# Altium PCB HolderDog.PcbDoc
Units mm, origin at the board's own origin, x right, y up, seen from the top; angles counter-clockwise.
Board outline 356.65 x 138 mm, 2 copper layers (Top Layer, Bottom Layer); 20 components, 15 nets, 104 pads, 35 vias.
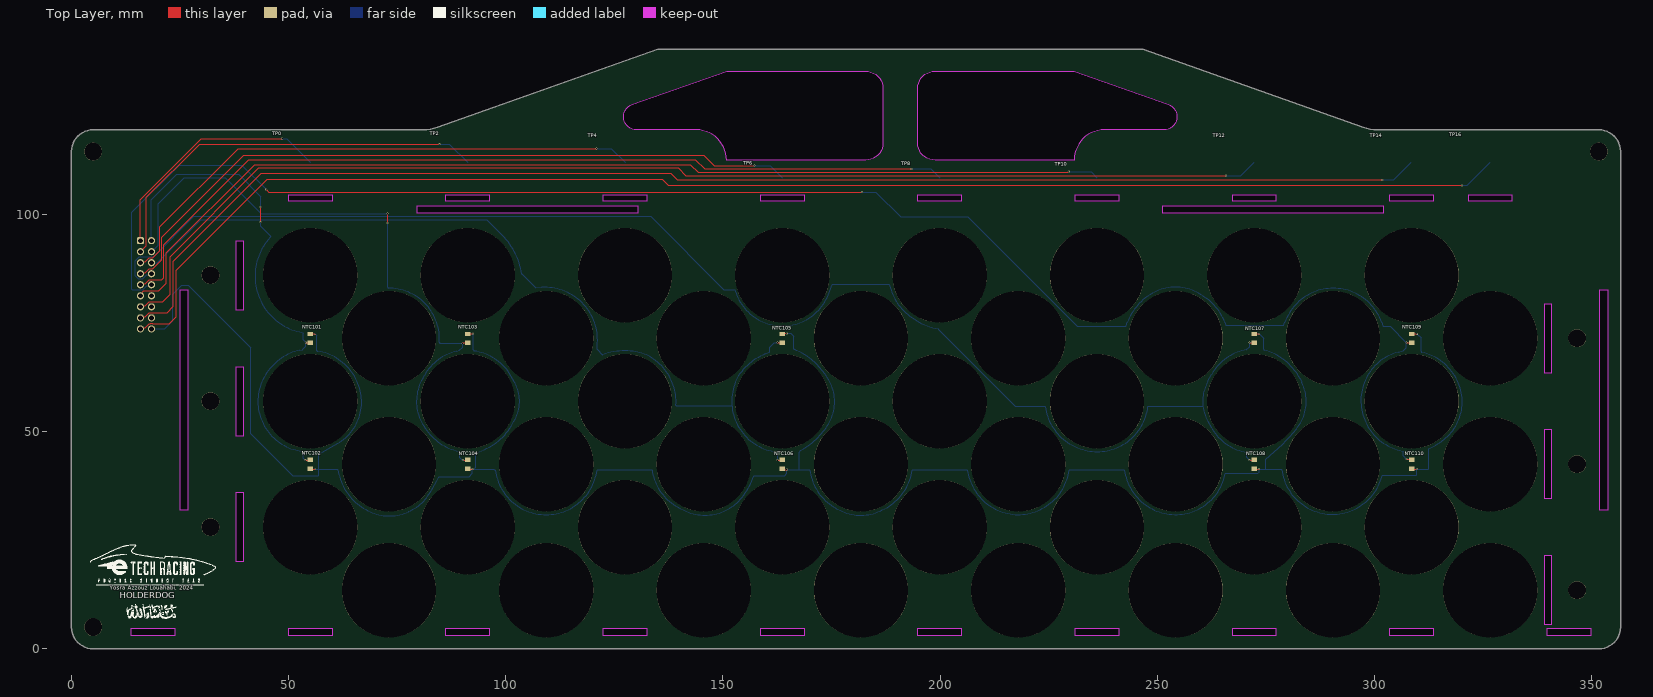
[diagram p0: Top Layer view]
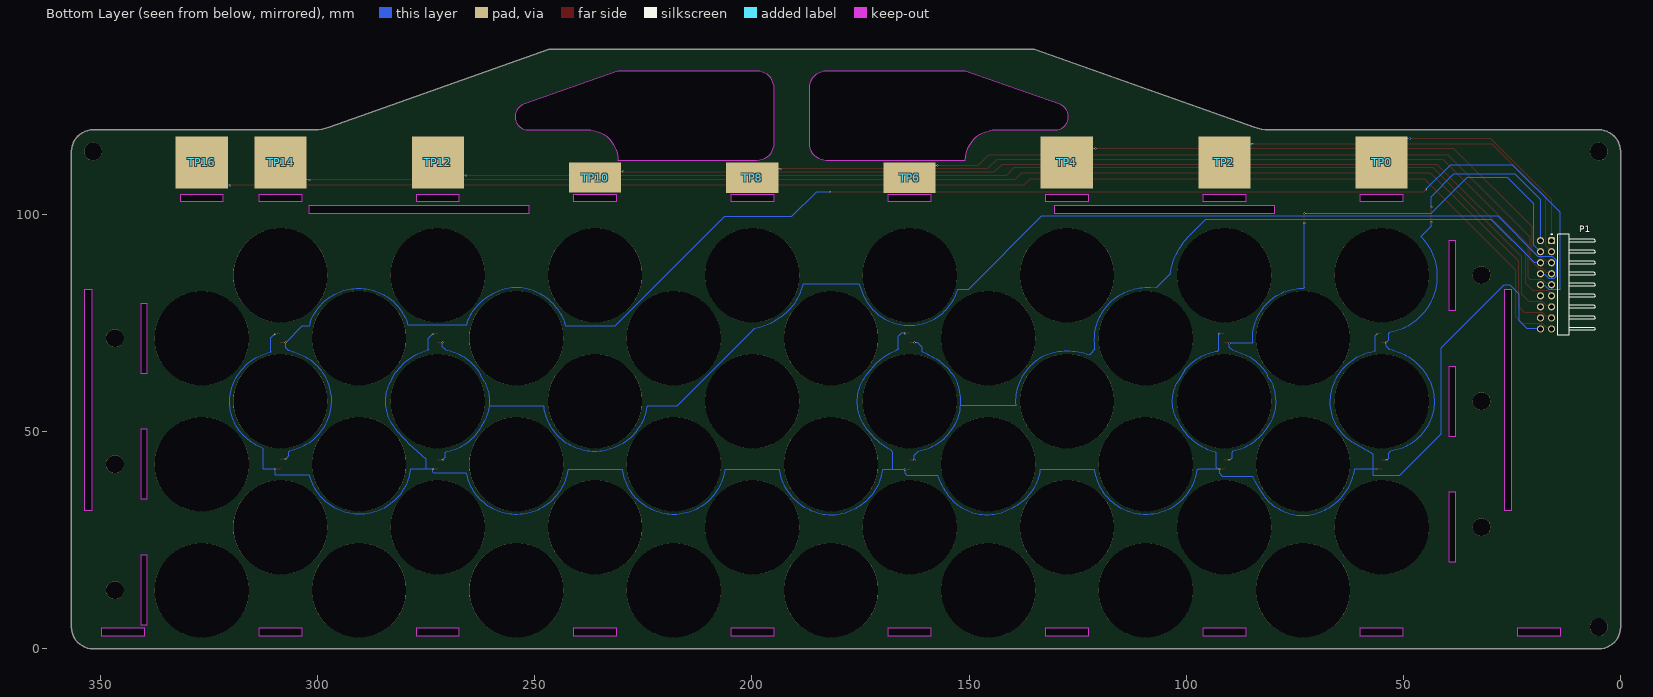
[diagram p1: Bottom Layer view, seen from below]
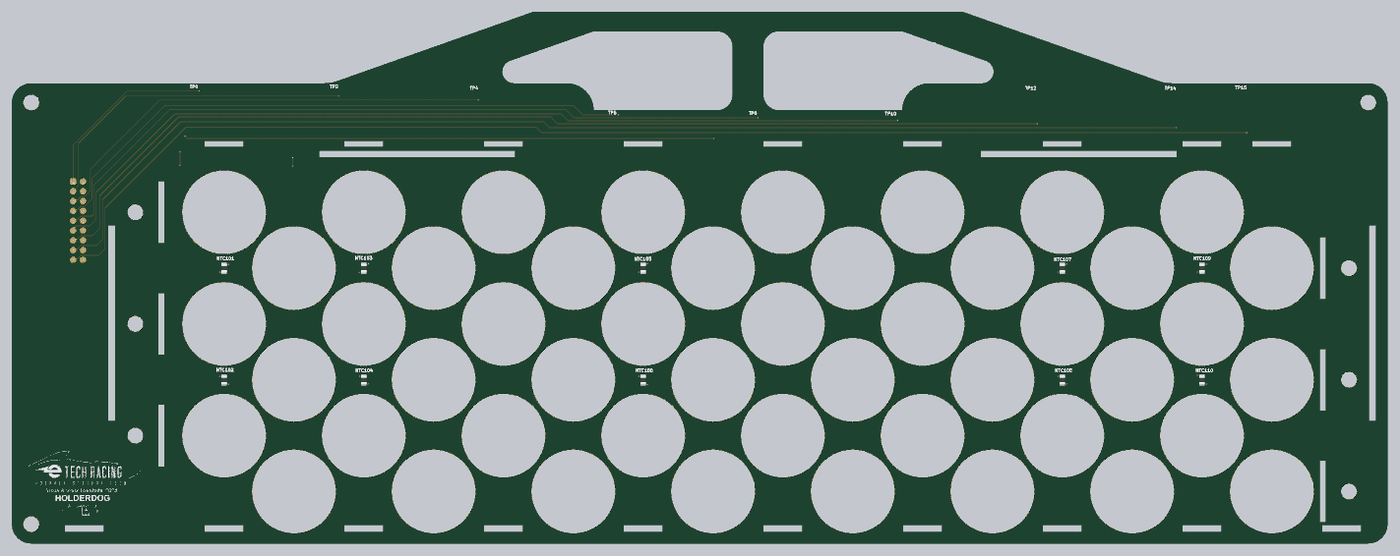
[diagram p2: 3D render of the assembled board from above, using the file's embedded part models]

## Layer stack, top to bottom
Top Solder: solder mask 0.0102, Solder Resist, Dk 3.5
Top Layer: signal copper 0.0356
Dielectric 1: dielectric 0.32, FR-4, Dk 4.8
Bottom Layer: signal copper 0.0356
Bottom Solder: solder mask 0.0102, Solder Resist, Dk 3.5

## Board outline
134.977,138 84.31,120.073 83.497,119.824 82.666,119.644 81.823,119.536 80.974,119.5 5,119.5 4.347,119.457 3.706,119.33 3.087,119.119 2.5,118.83 1.956,118.467 1.464,118.036 1.033,117.544 0.67,117 0.381,116.413 0.17,115.794 0.043,115.153 0,114.5 0,5 0.043,4.347 0.17,3.706 0.381,3.087 0.67,2.5 1.033,1.956 1.464,1.464 1.956,1.033 2.5,0.67 3.087,0.381 3.706,0.17 4.347,0.043 5,0 351.65,0 352.303,0.043 352.945,0.17 353.564,0.381 354.15,0.67 354.694,1.033 355.186,1.464 355.617,1.956 355.981,2.5 356.27,3.087 356.48,3.706 356.608,4.347 356.65,5 356.65,114.5 356.608,115.153 356.48,115.794 356.27,116.413 355.981,117 355.617,117.544 355.186,118.036 354.694,118.467 354.15,118.83 353.564,119.119 352.945,119.33 352.303,119.457 351.65,119.5 300.676,119.5 299.827,119.536 298.984,119.644 298.153,119.824 297.341,120.073 246.673,138
cut-out: 50,4.75 60,4.75 60,3 50,3
cut-out: 303.54,3 303.54,4.75 313.54,4.75 313.54,3
cut-out: 340.65,5.5 339.15,5.5 339.15,21.5 340.65,21.5
cut-out: 39.5,20 38,20 38,36 39.5,36
cut-out: 340.65,34.5 339.15,34.5 339.15,50.5 340.65,50.5
cut-out: 39.5,49 38,49 38,65 39.5,65
cut-out: 339.76,4.75 349.76,4.75 349.76,3 339.76,3
cut-out: 267.32,4.75 277.32,4.75 277.32,3 267.32,3
cut-out: 194.88,4.75 204.88,4.75 204.88,3 194.88,3
cut-out: 122.44,4.75 132.44,4.75 132.44,3 122.44,3
cut-out: 25,31.875 25,82.625 26.75,82.625 26.75,31.875
cut-out: 302.025,102 302.025,100.25 251.275,100.25 251.275,102
cut-out: 79.625,102 130.375,102 130.375,100.25 79.625,100.25
cut-out: 351.9,82.625 353.65,82.625 353.65,31.875 351.9,31.875
cut-out: 50,104.5 60,104.5 60,103 50,103
cut-out: 86.22,104.5 96.22,104.5 96.22,103 86.22,103
cut-out: 122.44,104.5 132.44,104.5 132.44,103 122.44,103
cut-out: 158.66,104.5 168.66,104.5 168.66,103 158.66,103
cut-out: 231.1,104.5 241.1,104.5 241.1,103 231.1,103
cut-out: 267.32,104.5 277.32,104.5 277.32,103 267.32,103
cut-out: 303.54,104.5 313.54,104.5 313.54,103 303.54,103
cut-out: 339.15,79.5 340.65,79.5 340.65,63.5 339.15,63.5
cut-out: 38,94 39.5,94 39.5,78 38,78
cut-out: 241.1,4.75 241.1,3 231.1,3 231.1,4.75
cut-out: 168.66,4.75 168.66,3 158.66,3 158.66,4.75
cut-out: 96.22,4.75 96.22,3 86.22,3 86.22,4.75
cut-out: 23.78,4.75 23.78,3 13.78,3 13.78,4.75
cut-out: 321.65,104.5 331.65,104.5 331.65,103 321.65,103
cut-out: 194.88,104.5 204.88,104.5 204.88,103 194.88,103
cut-out: 186.825,129 186.825,116.5 186.776,115.874 186.629,115.264 186.389,114.684 186.061,114.149 185.654,113.672 185.176,113.264 184.641,112.936 184.061,112.696 183.451,112.549 182.825,112.5 150.825,112.5 150.781,113.284 150.65,114.058 150.432,114.812 150.132,115.537 149.752,116.224 149.298,116.864 148.775,117.45 148.19,117.973 147.549,118.427 146.862,118.807 146.137,119.107 145.383,119.324 144.609,119.456 143.825,119.5 130.143,119.5 129.622,119.546 129.117,119.681 128.643,119.902 128.215,120.202 127.845,120.572 127.545,121 127.324,121.474 127.189,121.979 127.143,122.5 127.19,123.025 127.327,123.533 127.551,124.01 127.855,124.44 128.23,124.81 128.663,125.11 129.143,125.328 150.825,133 182.825,133 183.451,132.951 184.061,132.804 184.641,132.564 185.176,132.236 185.654,131.828 186.061,131.351 186.389,130.816 186.629,130.236 186.776,129.626
cut-out: 230.825,112.5 198.825,112.5 198.199,112.549 197.589,112.696 197.009,112.936 196.474,113.264 195.997,113.672 195.589,114.149 195.261,114.684 195.021,115.264 194.874,115.874 194.825,116.5 194.825,129 194.874,129.626 195.021,130.236 195.261,130.816 195.589,131.351 195.997,131.828 196.474,132.236 197.009,132.564 197.589,132.804 198.199,132.951 198.825,133 230.825,133 252.508,125.328 252.985,125.111 253.417,124.813 253.791,124.445 254.095,124.017 254.32,123.543 254.459,123.038 254.507,122.515 254.464,121.992 254.33,121.485 254.11,121.009 253.811,120.578 253.441,120.206 253.011,119.904 252.536,119.682 252.03,119.546 251.507,119.5 237.825,119.5 237.041,119.456 236.268,119.324 235.513,119.107 234.788,118.807 234.101,118.427 233.461,117.973 232.875,117.45 232.352,116.864 231.898,116.224 231.518,115.537 231.218,114.812 231.001,114.058 230.869,113.284

## Design rules (kind name [scope] priority, off if disabled: settings)
Clearance [All] p1: gap=0.254 ignorepadtopadclearanceinfootprint=FALSE
DiffPairsRouting [All] p1: maxlimit=0.2 minlimit=0.2 mostfreqgap=0.2 toplayer_minwidth=0.2 toplayer_maxwidth=0.2 toplayer_prefwidth=0.2 bottomlayer_minwidth=0.2 bottomlayer_maxwidth=0.2 bottomlayer_prefwidth=0.2 maxuncoupledlength=12.7
PolygonConnect [All] p1: connectstyle=Relief reliefconductorwidth=0.254 reliefentries=4 polygonreliefangle="90 Angle" airgapwidth=0.254
RoutingVias [All] p1: holewidth=0.3 width=0.45 viastyle="Through Hole" minholewidth=0.3 minwidth=0.45 maxholewidth=0.3 maxwidth=0.45
SolderMaskExpansion [All] p1: expansion=0.102 istentingtop=FALSE
SupplyNets "Schematic Supply Nets" [InNet('GND')] p1: voltage=0.000
UnRoutedNet [All] p1: checkbadconnections=TRUE
Width [All] p1: maxlimit=0.2 minlimit=0.2 preferedwidth=0.2 minimp=50.000000 maximp=50.000000 favimp=50.000000
28 further rules are at their usual default settings.

## Components (designator, comment, footprint, x,y, rotation, side; value= is the part's Value field where it differs from the comment)
NTC101 "NTC SMD 0805" RESC2012X10N 55,71.501 r90 top
NTC102 "NTC SMD 0805" RESC2012X10N 55,42.5 r270 top
NTC103 "NTC SMD 0805" RESC2012X10N 91.22,71.5 r90 top
NTC104 "NTC SMD 0805" RESC2012X10N 91.22,42.5 r270 top
NTC105 "NTC SMD 0805" RESC2012X10N 163.66,71.501 r90 top
NTC106 "NTC SMD 0805" RESC2012X10N 163.66,42.5 r270 top
NTC107 "NTC SMD 0805" RESC2012X10N 272.32,71.501 r90 top
NTC108 "NTC SMD 0805" RESC2012X10N 272.32,42.5 r270 top
NTC109 "NTC SMD 0805" RESC2012X10N 308.54,71.501 r90 top
NTC110 "NTC SMD 0805" RESC2012X10N 308.54,42.5 r270 top
P1 "61301821021" 61301821021 13.145,83.82 r90 bottom
TP0 "Test Point" TESTPOINT_WIDE#1 55,111.999 r0 top
TP2 "Test Point" TESTPOINT_WIDE#1 91.22,111.987 r0 top
TP4 "Test Point" TESTPOINT_WIDE#1 127.508,112.014 r0 top
TP6 "Test Point" TESTPOINT_WIDE#2 163.703,108.458 r0 top
TP8 "Test Point" TESTPOINT_WIDE#2 199.898,108.458 r0 top
TP10 "Test Point" TESTPOINT_WIDE#2 236.1,108.508 r0 top
TP12 "Test Point" TESTPOINT_WIDE#1 272.288,112.014 r0 top
TP14 "Test Point" TESTPOINT_WIDE#1 308.483,112.014 r0 top
TP16 "Test Point" TESTPOINT_WIDE#1 326.65,112 r0 top

## Footprints (in the part's own frame and the unit in brackets; to place one, negate y for a bottom-side part, rotate by r counter-clockwise, add the part's x,y. Pads: shape width x height; smd on the part's side, far side on the other; paste and mask are expansions set on the pad)
61301821021 [mm] "Pin Header, pitch 2.54 mm, THT, Angled, dual row, 18p"
  rrect50% 1.65x1.65 hole 1.1: 1(10.16,2.73)
  round 1.65 hole 1.1: 2(10.16,5.27) 3(7.62,2.73) 4(7.62,5.27) 5(5.08,2.73) 6(5.08,5.27) 7(2.54,2.73) 8(2.54,5.27) 9(0,2.73) 10(0,5.27) 11(-2.54,2.73) 12(-2.54,5.27) 13(-5.08,2.73) 14(-5.08,5.27) 15(-7.62,2.73) 16(-7.62,5.27) 17(-10.16,2.73) 18(-10.16,5.27)
  silkscreen extent -11.58,-7.27 11.71,2.83, body extent -11.43,-7.27 11.43,5.63, height 5.12
RESC2012X10N [mm] "Chip Resistor, 2-Leads, Body 2,00x1,25mm, IPC Medium Density"
  rect 1x1.3 smd: 1(-1,0) 2(1,0)
  body extent -1.1,-0.7 1.1,0.7, height 0.95
TESTPOINT_WIDE#1 [mm]
  rect 12x12 smd far side paste-2539.97: 1(0,0)
TESTPOINT_WIDE#2 [mm]
  rect 12x7 smd far side paste-2539.97: 1(0,0)

## Part data
NTC101 NTC102 NTC103 NTC104 NTC105 NTC106 NTC107 NTC108 NTC109 NTC110: library part CMP-010-00001-1, "NTC 0805 package 10kR"
P1: library part CMP-002-00004-1, "Board Connector, 18 Contact(s), 2 Row(s), Male, Right Angle, 0.1 inch Pitch, Solder Terminal, Locking, Black Insulator, Plug", Max Operating Temperature=125°C, Min Operating Temperature=-40°C, Connector Type="BOARD CONNECTOR", Mounting Technology=Board, RoHS Compliant=Yes
TP0 TP2 TP4 TP6 TP8 TP10 TP12 TP14 TP16: library part TestPoint_Wide, "TestPoint 5x5mm"

## Free pads (board coordinates)
  round 4.1 hole 4.1: 1(5,5) 1(5,114.5) 1(32,28) 1(32,57) 1(32,86) 1(346.65,13.5) 1(346.65,42.5) 1(346.65,71.5) 1(351.65,114.5)
  round 21.7 hole 21.7: 1(55,28) 1(55,57) 1(55,86) 1(73.11,13.5) 1(73.11,42.5) 1(73.11,71.5) 1(91.22,28) 1(91.22,57) 1(91.22,86) 1(109.33,13.5) 1(109.33,42.5) 1(109.33,71.5) 1(127.44,28) 1(127.44,57) 1(127.44,86) 1(145.55,13.5) 1(145.55,42.5) 1(145.55,71.5) 1(163.66,28) 1(163.66,57) 1(163.66,86) 1(181.77,13.5) 1(181.77,42.5) 1(181.77,71.5) 1(199.88,28) 1(199.88,57) 1(199.88,86) 1(217.99,13.5) 1(217.99,42.5) 1(217.99,71.5) 1(236.1,28) 1(236.1,57) 1(236.1,86) 1(254.21,13.5) 1(254.21,42.5) 1(254.21,71.5) 1(272.32,28) 1(272.32,57) 1(272.32,86) 1(290.43,13.5) 1(290.43,42.5) 1(290.43,71.5) 1(308.54,28) 1(308.54,57) 1(308.54,86) 1(326.65,13.5) 1(326.65,42.5) 1(326.65,71.5)

## Via types
v1: diameter 0.45, hole 0.3, Top Layer to Bottom Layer, tented both sides, 35 vias

## Nets (pads, with @x,y where several pads share a name; then routed paths per layer and width w, separated by ;. In a path a pad name is that pad's centre, name@x,y a point inside that pad or via, vN(x,y) a via of type N, cw(c..) or ccw(c..) an arc to the next point about the centre after c; other vN are vias at no path point)
GND: NTC101.2 NTC102.2 NTC103.2 NTC104.2 NTC105.2 NTC106.2 NTC107.2 NTC108.2 NTC109.2 NTC110.2 P1.18 | length 622.3
  Top Layer w0.2: NTC102.2 55.098,41.402 v1(56.134,41.402) ; NTC101.2 55.016,72.517 v1(56.134,72.517) ; NTC104.2 91.318,41.402 v1(92.329,41.402) ; NTC103.2 91.237,72.517 92.261,72.517 92.388,72.644 v1(92.456,72.644) ; NTC106.2 163.885,41.275 v1(164.719,41.275) ; NTC105.2 163.803,72.644 v1(164.719,72.644) ; NTC108.2 272.418,41.402 v1(273.431,41.402) ; NTC107.2 272.336,72.517 v1(273.431,72.517) ; NTC110.2 308.638,41.402 v1(309.753,41.402) ; NTC109.2 308.556,72.517 v1(309.753,72.517)
  Bottom Layer w0.2: P1.18 21.463,73.66 23.368,75.565 23.368,81.661 25.4,83.693 26.924,83.693 41.275,69.342 41.275,49.53 50.959,39.846 56.779,39.846 56.896,39.963 56.896,41.402 ; v1(56.134,41.402) 56.896,41.402 ; v1(56.134,72.517) 56.515,72.136 56.515,68.671 56.543,68.624 ccw(c56.715,68.726) 56.682,68.529 cw(c54.77,56.612) 66.625,58.874 cw(c55.853,56.819) 61.325,47.315 56.896,44.766 56.896,41.402 ; v1(92.456,72.644) 92.456,68.89 92.583,68.763 92.583,68.707 92.612,68.66 ccw(c92.783,68.763) 92.751,68.565 cw(c90.897,56.649) 98.865,65.701 98.868,65.699 cw(c90.094,55.736) 99.812,64.781 cw(c91.25,56.809) 100.21,64.33 cw(c95.952,60.755) 100.382,64.116 cw(c100.222,63.995) 100.392,64.1 100.393,64.099 101.887,61.637 cw(c94.243,56.997) 101.888,52.358 101.237,51.285 cw(c89.643,58.321) 93.255,45.249 93.138,45.132 93.138,41.83 92.71,41.402 ; v1(164.719,72.644) 165.608,72.644 166.243,72.009 166.243,69.135 166.243,69.118 166.246,69.101 ccw(c166.443,69.135) 166.365,68.951 cw(c159.758,52.937) 169.939,66.953 cw(c162.545,56.773) 171.441,65.67 171.447,65.663 173.398,63.322 ; 173.398,63.321 cw(c165.699,56.908) 173.397,50.494 172.32,49.203 cw(c161.795,57.975) 168.565,46.063 167.884,45.676 167.513,45.305 167.513,41.275 ; v1(273.431,72.517) 274.447,71.501 274.447,68.982 274.447,68.946 274.46,68.911 ccw(c274.647,68.982) 274.593,68.79 cw(c271.101,55.914) 282.894,62.151 283.293,61.33 cw(c274.326,56.974) 282.054,50.676 cw(c230.125,92.991) 278.932,47.11 278.925,47.104 274.955,43.639 274.955,41.338 ; v1(309.753,72.517) 310.192,72.078 310.319,72.078 310.769,71.628 310.769,68.463 310.769,68.419 310.787,68.38 ccw(c310.969,68.463) 310.923,68.268 cw(c308.289,56.634) 319.983,58.989 cw(c309.245,56.827) 315.552,47.871 315.49,47.824 cw(c307.76,57.845) 313.609,46.622 312.664,46.129 312.547,46.012 312.547,45.996 312.547,41.519 312.43,41.402 v1(309.753,41.402) 309.753,40.122 309.636,40.005 301.901,40.005 301.783,39.888 301.534,39.114 cw(c290.352,42.71) 289.648,30.984 cw(c290.357,42.794) 278.725,40.636 278.616,41.221 278.499,41.338 278.441,41.338 274.955,41.338 ; 56.896,41.402 61.189,41.402 61.248,41.402 61.365,41.285 61.47,40.701 ccw(c73.435,42.844) 68.255,31.848 ccw(c73.189,41.046) 77.633,31.601 77.693,31.627 ccw(c73.849,40.738) 82.073,35.246 ccw(c46.074,59.283) 84.58,39.511 84.661,39.592 91.535,39.592 92.329,40.386 v1(92.329,41.402) 92.71,41.402 ; 92.71,41.402 97.268,41.402 97.395,41.275 97.454,41.275 97.571,41.158 ccw(c109.283,42.689) 109.283,30.877 ccw(c109.283,42.69) 120.907,40.58 121.012,41.158 121.129,41.275 133.511,41.275 133.57,41.275 133.687,41.158 ccw(c144.975,42.644) 139.997,32.405 141.08,31.878 ccw(c145.859,41.708) 150.653,31.885 150.669,31.893 ccw(c146.243,41.176) 153.984,34.405 153.989,34.411 ccw(c142.23,44.688) 157.057,39.786 157.15,39.878 164.211,39.878 164.719,40.386 v1(164.719,41.275) 167.513,41.275 ; 167.513,41.275 169.803,41.275 169.862,41.275 169.979,41.158 ccw(c181.676,42.698) 175.857,32.435 ccw(c180.825,41.195) 176.389,32.153 176.464,32.117 ccw(c181.716,41.575) 186.713,31.979 ccw(c181.787,42.822) 193.479,40.556 193.595,41.158 193.713,41.275 206.109,41.275 206.168,41.275 206.285,41.158 ccw(c217.86,42.675) 212.719,32.194 212.754,32.176 ccw(c217.999,42.283) 222.978,32.042 223.011,32.059 ccw(c218.13,42.676) 229.717,41.158 229.834,41.275 242.239,41.275 242.296,41.275 242.414,41.158 242.529,40.558 ccw(c254.219,42.81) 253.374,30.935 ccw(c254.203,42.586) 265.456,39.456 265.684,40.269 265.801,40.386 273.177,40.386 273.431,40.64 v1(273.431,41.402) 273.479,41.354 273.656,41.354 273.671,41.338 274.955,41.338
NTC1: NTC101.1 NTC102.1 P1.2 | length 120.6
  Top Layer w0.2: v1(43.561,98.227) v1(43.561,101.727) ; v1(53.848,43.434) 54.934,43.434 NTC102.1 ; v1(53.975,70.485) 54.984,70.485 NTC101.1
  Bottom Layer w0.2: P1.2 18.415,103.442 24.193,109.22 38.481,109.22 43.561,104.14 v1(43.561,101.727) ; v1(43.561,98.227) 43.561,97.282 45.854,94.989 45.854,94.823 45.669,94.619 ccw(c55.423,85.796) 52.532,72.966 53.223,72.81 53.34,72.693 53.34,72.64 53.34,71.12 v1(53.975,70.485) 53.975,69.668 53.264,68.957 53.223,68.916 53.167,68.903 52.555,68.764 ccw(c55.251,56.938) 46.982,65.812 ccw(c58.29,53.676) 45.667,64.437 ccw(c54.43,56.966) 51.667,45.787 52.934,45.473 52.988,45.46 53.394,45.054 53.394,43.888 v1(53.848,43.434)
NTC2: NTC103.1 NTC104.1 P1.4 | length 152
  Top Layer w0.2: v1(72.771,98.044) v1(72.771,100.203) ; v1(90.043,70.358) 90.111,70.358 90.253,70.5 NTC103.1 ; v1(90.17,43.434) 91.154,43.434 NTC104.1
  Bottom Layer w0.2: P1.4 19.939,92.964 19.939,102.426 25.971,108.458 35.433,108.458 43.688,100.203 v1(72.771,100.203) ; v1(72.771,98.044) 72.771,83.258 72.771,83.176 72.829,83.117 72.888,83.058 72.97,83.058 cw(c73.004,71.328) 84.709,70.57 ccw(c84.909,70.558) 84.802,70.389 84.851,70.358 84.909,70.358 v1(90.043,70.358) 90.043,69.467 89.33,68.754 89.291,68.714 89.237,68.701 88.651,68.554 ccw(c91.525,57.08) 81.295,63.018 ; 81.295,63.018 80.839,62.233 ccw(c89.875,56.989) 81.107,51.31 ccw(c91.569,57.381) 88.643,45.644 89.291,45.482 89.408,45.365 89.408,45.315 89.408,43.942 89.872,43.478 90.126,43.478 v1(90.17,43.434)
NTC3: NTC105.1 NTC106.1 P1.6 | length 203.2
  Top Layer w0.2: v1(162.56,43.434) 163.594,43.434 NTC106.1 ; v1(162.56,70.485) 163.644,70.485 NTC105.1
  Bottom Layer w0.2: P1.6 19.812,88.9 29.718,98.806 95.601,98.806 99.179,95.227 cw(c87.798,83.844) 103.704,86.314 103.709,86.283 103.755,86.237 106.867,83.125 108.297,83.207 cw(c108.991,71.097) 121.101,70.403 121.024,69.063 121.023,69.057 121.023,68.969 122.251,67.741 122.367,67.741 cw(c127.32,54.082) 129.337,68.47 129.367,68.467 cw(c128.116,58.133) 134.086,66.659 cw(c127.206,56.834) 139.18,56.124 139.297,56.007 139.365,56.007 152.019,56.007 ; v1(162.56,43.434) 162.56,44.572 161.798,45.334 161.739,45.393 161.7,45.433 cw(c163.77,57.013) 153.111,61.987 cw(c166.033,55.957) 153.532,62.818 cw(c164.629,55.527) 159.774,67.886 160.665,68.236 160.782,68.353 160.782,69.469 161.798,70.485 v1(162.56,70.485)
NTC4: NTC107.1 NTC108.1 P1.8 | length 336
  Top Layer w0.2: v1(271.272,43.434) 272.254,43.434 NTC108.1 ; v1(271.272,70.485) 272.304,70.485 NTC107.1
  Bottom Layer w0.2: P1.8 18.163,86.108 17.29,86.108 16.363,85.181 15.387,85.181 14.696,85.872 14.696,89.388 15.569,90.261 18.903,90.261 28.21,99.568 133.327,99.568 150.191,82.704 152.615,82.704 152.702,82.617 153.195,81.409 ccw(c163.7,85.694) 174.205,81.408 175.206,83.86 175.235,83.888 175.293,83.947 188.173,83.947 188.219,83.947 188.336,83.83 188.525,83.15 ccw(c200.058,86.351) 191.595,77.886 ccw(c202.479,88.772) 199.509,73.668 199.552,73.625 217.297,55.88 224.047,55.88 224.108,55.88 224.225,55.763 ccw(c235.67,57.16) 230.792,46.712 231.217,46.514 ccw(c236.171,57.124) 241.127,46.514 ccw(c236.142,57.188) 247.836,55.763 247.953,55.88 260.497,55.88 260.5,55.883 ; v1(271.272,43.434) 270.637,44.069 270.637,45.106 270.637,45.157 270.52,45.275 cw(c272.491,56.686) 262.393,51.019 261.649,52.344 cw(c269.926,56.987) 260.5,55.883 ; v1(271.272,70.485) 271.272,69.601 270.52,68.849 ccw(c272.46,57.63) 262.531,63.202 261.649,61.631 ccw(c269.926,56.987) 260.5,55.883
NTC5: NTC109.1 NTC110.1 P1.10 | length 393
  Top Layer w0.2: v1(44.831,105.791) 45.466,105.156 v1(181.991,105.156) ; v1(307.34,43.688) 308.352,43.688 NTC110.1 ; v1(307.34,70.485) 308.524,70.485 NTC109.1
  Bottom Layer w0.2: P1.10 18.163,83.568 17.29,83.568 16.363,82.641 13.96,82.641 13.843,82.758 13.843,100.467 13.96,100.584 13.97,100.584 24.765,111.379 39.243,111.379 v1(44.831,105.791) ; v1(181.991,105.156) 185.166,105.156 190.881,99.441 206.375,99.441 231.521,74.295 242.685,74.295 242.72,74.295 242.837,74.412 243.112,75.161 cw(c254.795,70.874) 247.615,81.039 247.922,81.255 cw(c254.206,72.357) 260.491,81.255 261.321,80.669 cw(c254.518,71.037) 265.574,75.137 265.792,74.549 279.137,74.549 279.379,75.213 cw(c290.524,71.154) 290.523,83.015 cw(c290.524,71.185) 301.644,75.222 301.938,74.412 302.055,74.295 302.09,74.295 303.403,74.295 303.462,74.236 303.589,74.236 v1(307.34,70.485) 307.34,69.342 306.608,68.61 306.556,68.596 305.447,68.304 ccw(c308.392,57.161) 296.875,56.741 ccw(c308.749,57.174) 305.751,45.677 306.461,45.492 306.578,45.375 306.578,45.327 306.578,44.45 v1(307.34,43.688)
V0: P1.1 TP0.1 | length 56.7
  Top Layer w0.2: P1.1 15.875,103.442 29.908,117.475 v1(48.514,117.475)
  Bottom Layer w0.2: v1(48.514,117.475) 49.524,117.475 TP0.1
V2: P1.3 TP2.1 | length 93.9
  Top Layer w0.2: P1.3 17.236,92.801 17.236,103.93 29.511,116.205 v1(84.709,116.205)
  Bottom Layer w0.2: v1(84.709,116.205) 87.001,116.205 TP2.1
V4: P1.5 TP4.1 | length 127
  Top Layer w0.2: P1.5 16.127,89.152 17,89.152 17.927,90.079 18.721,90.079 20.301,91.659 20.301,97.136 38.354,115.189 v1(120.904,115.189)
  Bottom Layer w0.2: v1(120.904,115.189) 124.333,115.189 TP4.1
V6: P1.7 TP6.1 | length 164.4
  Top Layer w0.2: P1.7 16.127,86.612 17,86.612 17.927,87.539 18.721,87.539 20.755,89.573 20.755,94.796 39.628,113.669 145.538,113.669 147.955,111.252 v1(157.226,111.252)
  Bottom Layer w0.2: v1(157.226,111.252) 160.909,111.252 TP6.1
V8: P1.9 TP8.1 | length 202.2
  Top Layer w0.2: P1.9 16.127,84.072 17,84.072 17.927,84.999 20.737,84.999 21.209,85.471 21.209,93.091 40.767,112.649 143.637,112.649 145.796,110.49 v1(193.421,110.49)
  Bottom Layer w0.2: v1(193.421,110.49) 197.866,110.49 TP8.1
V10: P1.11 TP10.1 | length 238.4
  Top Layer w0.2: P1.11 15.875,81.661 16.673,82.459 20.102,82.459 21.844,84.201 21.844,91.186 42.164,111.506 142.494,111.506 144.272,109.728 229.421,109.728 229.548,109.855 v1(229.616,109.855)
  Bottom Layer w0.2: v1(229.616,109.855) 234.752,109.855 TP10.1
V12: P1.13 TP12.1 | length 276.7
  Top Layer w0.2: P1.13 16.127,78.992 17,78.992 17.927,79.919 20.991,79.919 22.733,81.661 22.733,90.297 43.18,110.744 139.7,110.744 141.478,108.966 v1(265.811,108.966)
  Bottom Layer w0.2: v1(265.811,108.966) 269.24,108.966 TP12.1
V14: P1.15 TP14.1 | length 314.8
  Top Layer w0.2: P1.15 16.127,76.452 17,76.452 17.927,77.379 22.007,77.379 23.495,78.867 23.495,89.288 43.681,109.474 137.922,109.474 139.446,107.95 v1(301.879,107.95)
  Bottom Layer w0.2: v1(301.879,107.95) 304.419,107.95 TP14.1
V16: P1.17 TP16.1 | length 334.1
  Top Layer w0.2: P1.17 16.127,73.912 17,73.912 17.891,74.803 18.126,74.803 cw(c18.415,73.66) 18.704,74.803 22.479,74.803 24.13,76.454 24.13,87.122 45.085,108.077 136.017,108.077 137.414,106.68 v1(320.167,106.68)
  Bottom Layer w0.2: v1(320.167,106.68) 321.33,106.68 TP16.1
pads on no net: P1.12 P1.14 P1.16

## Silkscreen, mask and mechanical layers (free items; w line width, h text height)
Top Overlay:
  drawing of 157 lines, arcs and shapes, not listed
  text "Yosra Azzouz Louahabi, 2024" at 8.768,13.284 h1.6
  text "HOLDERDOG" at 11.176,11.079 h2.5